# EAGLE board cardinal_v6_3 (EAGLE 5.11)
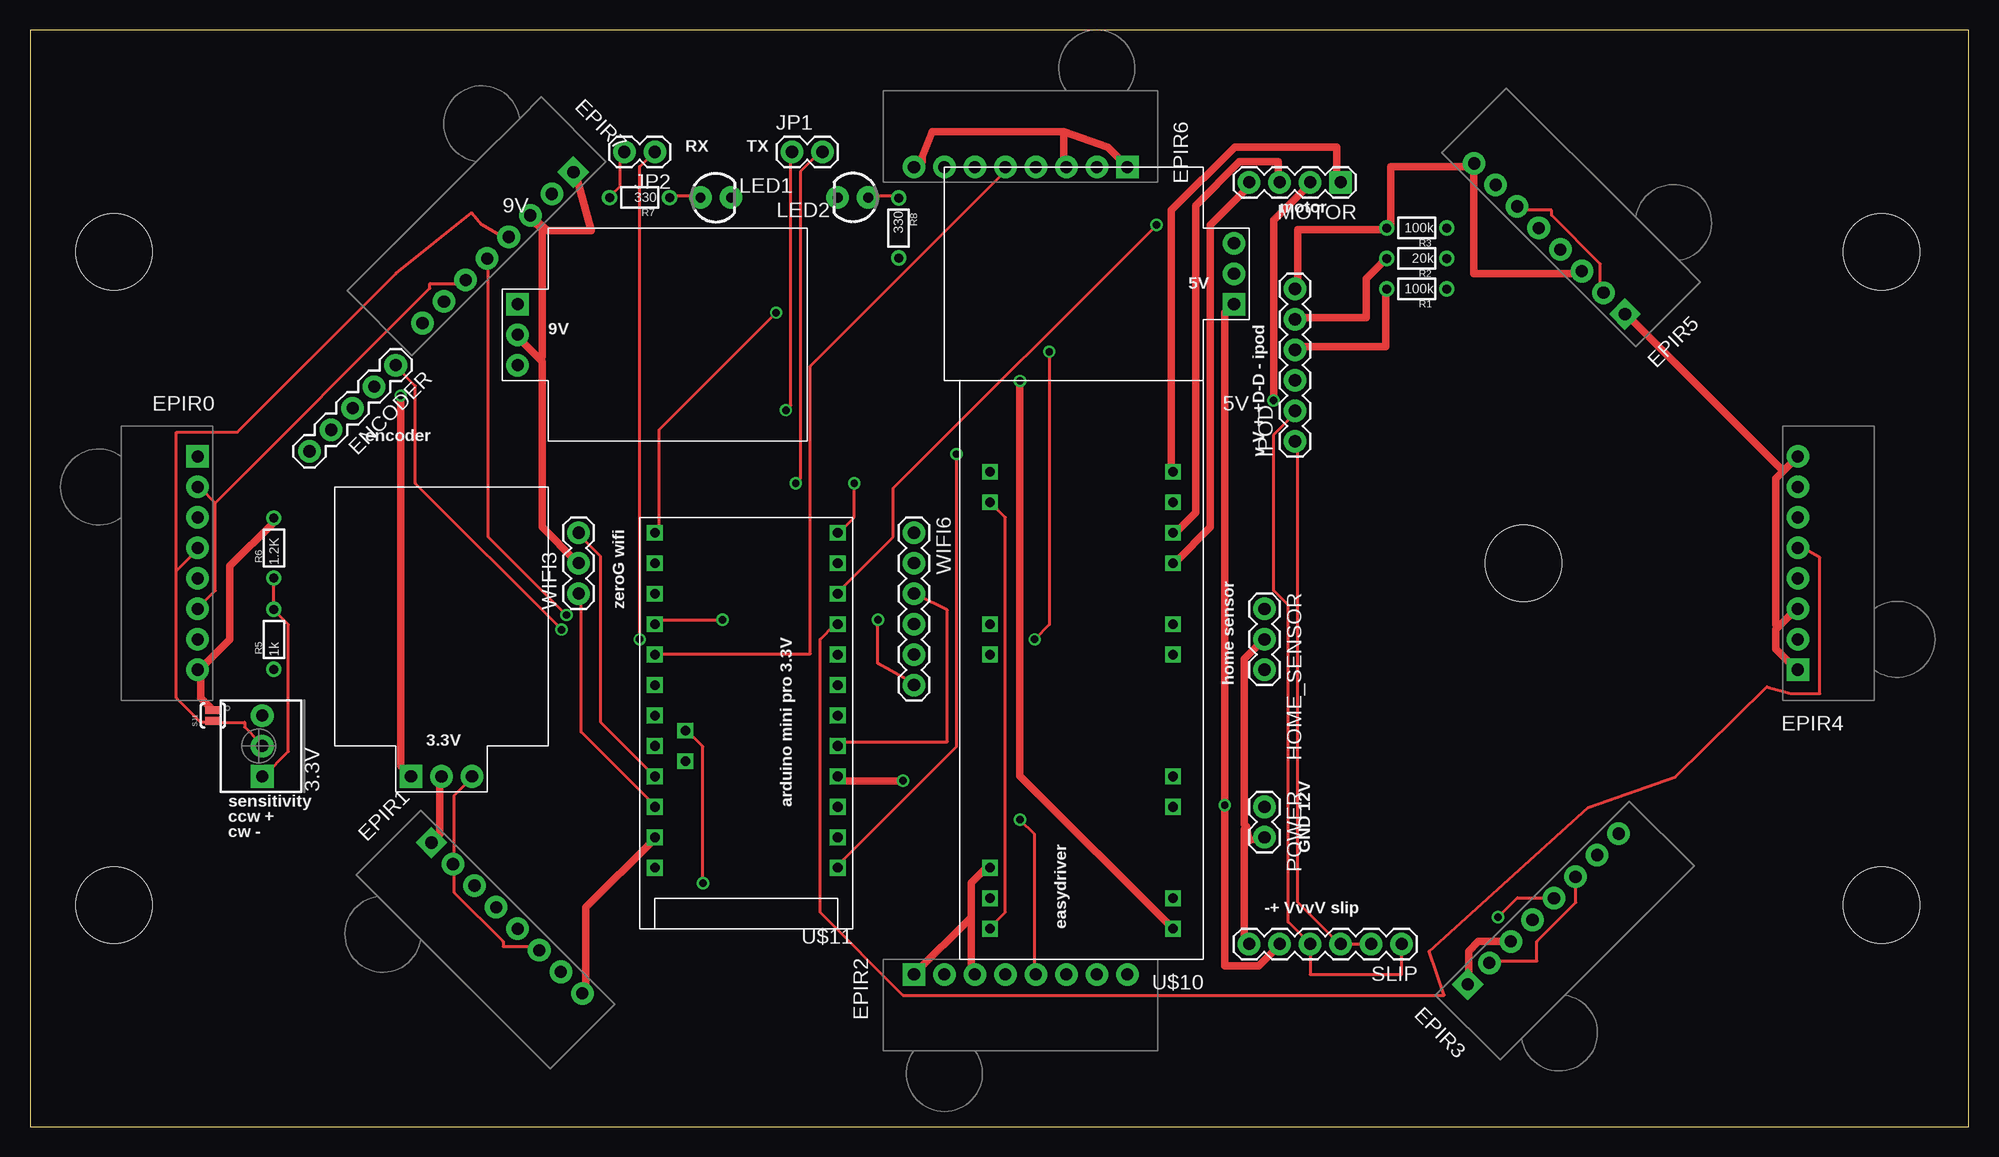
[diagram p0: board, top side]
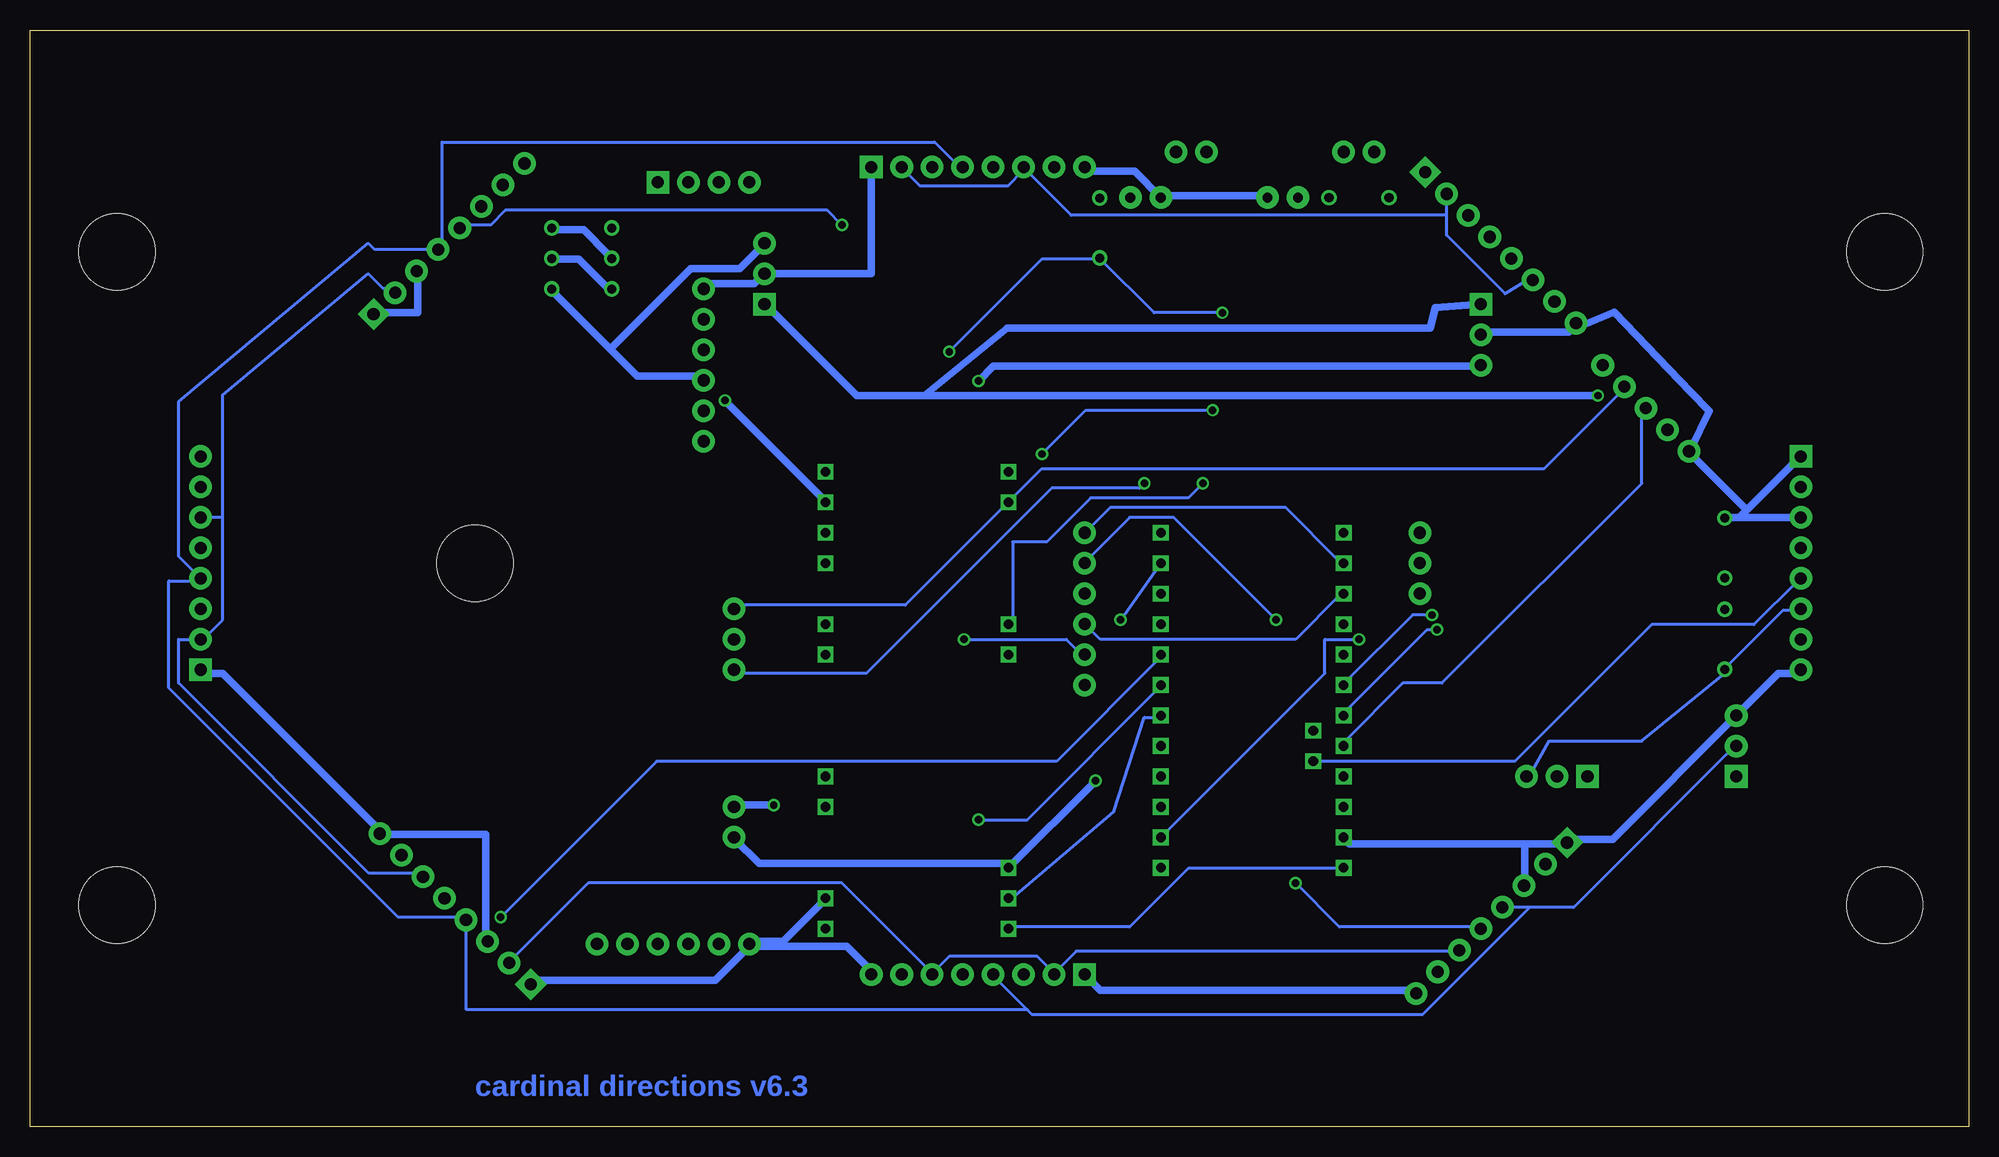
[diagram p1: board, bottom side, seen from below]

Size 161.54 x 91.44 mm. Coordinates in mm from the lower left corner, seen from the top.
Outline: 0,0 161.54,0 161.54,91.44 0,91.44 0,0
Copper layers (1*16): Top 0.035mm / dielectric 1.5mm / Bottom 0.035mm
Design rules "default *": minimum track width 10mil, minimum drill 24mil, track to track 16mil, track to pad 16mil, pad to pad 8mil, via to via 8mil, smd to smd 8mil, copper to edge 40mil, drill to drill 8mil, minimum pad ring 10mil, minimum via ring 8mil, stop-mask expansion 4mil, vias tented up to drill 0mil, thermal gap 10mil
Net classes: 1 normal 24 mil: width 0.61 mm
Holes 6.35 mm at 124.46,46.99 6.99,18.49 6.99,72.95 154.31,18.49 154.31,72.95

## Footprints (pad centres in the part's own frame; a part is rotated, then mirrored left to right if it is on the bottom)
DE-SW_CONVERTER = drill 1.016 pad 1.88 square: 1 0,2.54 | drill 1.016 pad 1.88 round: 2 0,0; 3 0,-2.54
1X05 = drill 1.016 pad 1.88 round: 1 0,0; 2 2.54,0; 3 5.08,0; 4 7.62,0; 5 10.16,0
EPIR = drill 1.016 pad 1.88 square: 1 0,10.16 | drill 1.016 pad 1.88 round: 2 0,7.62; 3 0,5.08; 4 0,2.54; 5 0,0; 6 0,-2.54; 7 0,-5.08; 8 0,-7.62
1X03 = drill 1.016 pad 1.88 round: 1 0,0; 2 2.54,0; 3 5.08,0
1X06 = drill 1.016 pad 1.88 round: 1 0,0; 2 2.54,0; 3 5.08,0; 4 7.62,0; 5 10.16,0; 6 12.7,0
1X02 = drill 1.016 pad 1.88 round: 1 0,0; 2 2.54,0
LED3MM = drill 0.813 pad 1.88 round: A -1.27,0; K 1.27,0
1X04 = drill 1.016 pad 1.88 square: 1 0,0 | drill 1.016 pad 1.88 round: 2 2.54,0; 3 5.08,0; 4 7.62,0
1/6W-RES = drill 0.762 round: 1 -2.5,0; 2 2.5,0
3362U-2 = drill 1.016 pad 1.88 square: 1 -2.54,-0.305 | drill 1.016 pad 1.88 round: 2 0,-0.305; 3 2.54,-0.305
SJ_2S-NO = smd 0.635 x 1.27: 1 -0.45,0; 2 0.45,0
EASYDRIVER_V43 = drill 0.8 square: 1 -7.62,17.78; 2 -7.62,15.24; 3 -7.62,7.62; 4 -7.62,5.08; 5 -7.62,-5.08; 6 -7.62,-7.62; 7 -7.62,-12.7; 8 -7.62,-15.24; 9 -7.62,-17.78; 10 -7.62,-20.32; 11 7.62,17.78; 12 7.62,15.24; 13 7.62,12.7; 14 7.62,-5.08; 15 7.62,-7.62; 16 7.62,-17.78; 17 7.62,-20.32
ARDUINO_MINI_PRO = drill 0.8 square: 2 -7.62,2.54; 3 -7.62,0; 4 -7.62,-2.54; 5 -7.62,-5.08; 6 -7.62,-7.62; 7 -7.62,-10.16; 8 -7.62,-12.7; 9 -7.62,-15.24; 10 7.62,-15.24; 11 7.62,-12.7; 12 7.62,-10.16; 13 7.62,-7.62; A0 7.62,-5.08; A1 7.62,-2.54; A2 7.62,0; A3 7.62,2.54; A4 5.08,1.27; A5 5.08,3.81; GND -7.62,5.08; GND@1 7.62,10.16; RAW 7.62,12.7; RST -7.62,7.62; RST@1 7.62,7.62; RXI -7.62,10.16; TX0 -7.62,12.7; VCC 7.62,5.08

## Placement (x,y rotation side)
3.3V  DE-SW-CONVERTERA  [DE-SW_CONVERTER]  34.29,29.21 90 top
5V  DE-SW-CONVERTERA  [DE-SW_CONVERTER]  100.33,71.12 180 top
9V  DE-SW-CONVERTERA  [DE-SW_CONVERTER]  40.64,66.04 0 top
ENCODER  [1X05]  30.48,63.5 225 top
EPIR0  EPIRA  [EPIR]  13.97,45.72 0 top
EPIR1  EPIRA  [EPIR]  40.64,16.51 45 top
EPIR2  EPIRA  [EPIR]  83.82,12.7 90 top
EPIR3  EPIRA  [EPIR]  127,19.05 135 top
EPIR4  EPIRA  [EPIR]  147.32,48.26 180 top
EPIR5  EPIRA  [EPIR]  125.73,74.93 225 top
EPIR6  EPIRA  [EPIR]  81.28,80.01 270 top
EPIR7  EPIRA  [EPIR]  38.1,72.39 315 top
HOME_SENSOR  [1X03]  102.87,43.18 270 top
IPOD  v-v+ + D-D+ -  [1X06]  105.41,57.15 90 top
JP1  sleep JP  [1X02]  63.5,81.28 0 top
JP2  LED JP  [1X02]  52.07,81.28 180 top
LED1  [LED3MM]  57.15,77.47 0 top
LED2  [LED3MM]  68.58,77.47 180 top
MOTOR  [1X04]  109.22,78.74 180 top
POWER  [1X02]  102.87,26.67 270 top
R1  100k  [1/6W-RES]  115.57,69.85 180 top
R2  20k  [1/6W-RES]  115.57,72.39 180 top
R3  100k  [1/6W-RES]  115.57,74.93 180 top
R4  TRIMPOT 1K  [3362U-2]  19.05,31.75 90 top
R5  1k  [1/6W-RES]  20.32,40.64 90 top
R6  1.2K  [1/6W-RES]  20.32,48.26 90 top
R7  330  [1/6W-RES]  50.8,77.47 180 top
R8  330  [1/6W-RES]  72.39,74.93 270 top
SJ1  SOLDERJUMPERNO  [SJ_2S-NO]  15.24,34.29 90 top
SLIP  [1X06]  114.3,15.24 180 top
U$10  EASYDRIVER_V43A  [EASYDRIVER_V43]  87.63,34.29 180 top
U$11  ARDUINO_MINI_PROA  [ARDUINO_MINI_PRO]  59.69,34.29 180 top
WIFI3  [1X03]  45.72,44.45 90 top
WIFI6  [1X06]  73.66,49.53 270 top

## Library data of the parts
3.3V 5V 9V EPIR0 EPIR1-EPIR7 U$10 U$11 = stephanschulz
ENCODER HOME_SENSOR IPOD JP1 JP2 LED1 LED2 MOTOR POWER R1-R8 SJ1 SLIP WIFI3 WIFI6 = SparkFun

## Nets
3.3V: 3.3V.3 EPIR0.2 EPIR0.6 EPIR1.2 EPIR1.6 EPIR2.2 EPIR2.6 EPIR3.2 EPIR3.6 EPIR4.2 EPIR4.6 EPIR5.2 EPIR5.6 EPIR6.2 EPIR6.6 EPIR7.2 EPIR7.6 R5.1
5V [normal 24 mil]: 5V.3 IPOD.3 R1.1
5V#2: ENCODER.2 HOME_SENSOR.1 U$10.11 U$10.16 U$11.RAW
12V [normal 24 mil]: 3.3V.1 5V.1 9V.1 POWER.1 SLIP.5
GND [normal 24 mil]: 3.3V.2 5V.2 9V.2 ENCODER.5 EPIR0.1 EPIR0.3 EPIR0.8 EPIR1.1 EPIR1.3 EPIR1.8 EPIR2.1 EPIR2.3 EPIR2.8 EPIR3.1 EPIR3.3 EPIR3.8 EPIR4.1 EPIR4.3 EPIR4.8 EPIR5.1 EPIR5.3 EPIR5.8 EPIR6.1 EPIR6.3 EPIR6.8 EPIR7.1 EPIR7.3 EPIR7.8 HOME_SENSOR.2 IPOD.6 LED1.K LED2.K POWER.2 R3.2 R4.3 R6.2 SJ1.2 SLIP.6 U$10.2 U$10.13 U$11.GND U$11.GND@1 WIFI3.2
N$1: R4.1 R5.2 R6.1
N$3: JP1.1 U$11.TX0
N$4: JP2.1 U$11.RXI
N$5: JP2.2 R7.2
N$6: LED1.A R7.1
N$9: IPOD.1 SLIP.2 SLIP.3
N$10: LED2.A R8.1
N$11: IPOD.2 SLIP.1 SLIP.4
N$13 [normal 24 mil]: IPOD.5 R2.2 R3.1
N$14 [normal 24 mil]: IPOD.4 R1.2 R2.1
N$16 [normal 24 mil]: MOTOR.4 U$10.7
N$17 [normal 24 mil]: MOTOR.3 U$10.8
N$18 [normal 24 mil]: MOTOR.2 U$10.9
N$19 [normal 24 mil]: MOTOR.1 U$10.10
N$22: U$11.11 WIFI6.1
N$23: JP1.2 U$10.15
N$24: U$11.13 WIFI6.2
N$25: U$11.2 WIFI6.3
N$26 [normal 24 mil]: 9V.3 U$10.1
N$27: U$11.VCC WIFI3.3
N$29: U$11.12 WIFI6.4
N$30: R8.2 U$11.10 WIFI6.5
N$31: U$11.8 WIFI6.6
N$32: U$11.RST@1 WIFI3.1
N$33: ENCODER.1 U$11.A2
N$34: ENCODER.3 U$11.A3
N$35: EPIR6.5 U$11.A0
N$36: U$10.12 U$11.3
N$37: EPIR0.5 U$11.A5
N$38: EPIR1.5 U$11.A4
N$39: EPIR2.5 U$11.4
N$40: EPIR3.5 U$11.5
N$41: EPIR4.5 U$11.6
N$42: EPIR5.5 U$11.7
N$43: EPIR7.5 U$11.A1
N$44: HOME_SENSOR.3 U$11.9
SNS: EPIR0.4 EPIR1.4 EPIR2.4 EPIR3.4 EPIR4.4 EPIR5.4 EPIR6.4 EPIR7.4 R4.2 SJ1.1

## Tracks (layer width: path | path; a pad name or v marks a point on that pad's centre or on a via)
3.3V
  Top 0.254: EPIR3.2 121.92,13.82 125.58,13.82 125.58,15.44 128.83,18.69 128.83,20.73 EPIR3.6 | EPIR5.6 123.95,76.4 126.8,76.4 126.8,76 130.86,71.93 130.86,69.9 EPIR5.2 | 15.44,52.02 14.22,53.24 EPIR0.2 | 15.44,52.02 15.44,44.7 14.22,43.48 EPIR0.6 | EPIR1.6 42.27,15.04 39.42,15.04 39.42,15.44 35.36,19.51 35.36,21.54 EPIR1.2 35.36,21.95 35.36,27.64 36.58,28.85 3.3V.3 | 15.44,52.02 33.33,69.9 33.33,70.31 36.17,70.31 EPIR7.6
  Bottom 0.254: 145.49,50.8 145.49,42.27 147.12,40.64 EPIR4.2 149.15,40.64 149.15,36.98 133.3,21.13 128.83,21.13 EPIR3.6 | 145.49,50.8 EPIR4.6 | 145.49,50.8 145.49,61.01 133.35,71.12 132.13,69.9 131.27,69.9 EPIR5.2 | EPIR6.2 88.59,79.65 87.38,78.44 80.06,78.44 78.84,79.65 EPIR6.6 78.44,79.65 74.78,76 43.48,76 | 43.48,76 43.48,74.32 38.61,69.44 36.58,70.71 EPIR7.6 | 43.48,76 43.48,77.62 EPIR7.2 | EPIR0.6 14.22,43.08 15.44,43.08 20.32,38.2 R5.1 20.32,37.8 27.23,32.16 34.95,32.16 36.58,29.26 3.3V.3 | EPIR1.6 42.67,14.63 74.37,14.63 76,13.01 EPIR2.2 76.4,13.01 77.62,14.22 84.94,14.22 86.16,13.01 EPIR2.6 86.56,13.01 93.88,20.32 115.01,20.32 121.51,13.82 EPIR3.2
5V
  Bottom 0.61: 113.18,64.82 110.95,62.59 105.66,62.59 IPOD.3 | 113.18,64.82 117.86,69.49 R1.1 | 5V.3 100.38,73.56 102.41,71.53 106.48,71.53 113.18,64.82
5V#2
  Top 0.254: U$10.11 80.06,16.66 81.28,17.88 81.28,50.8 U$10.16
  Bottom 0.254: U$11.RAW 52.43,21.54 65.02,21.54 69.9,16.66 79.65,16.66 U$10.11 | HOME_SENSOR.1 102.82,43.48 88.59,43.48 U$10.16 77.22,54.86 35.36,54.86 28.85,61.37 ENCODER.2
12V  (via drill 0.61)
  Top 0.61: v30.89,60.96 30.89,30.07 3.3V.1 | SLIP.5 104.04,15.04 102.41,13.41 99.57,13.41 v99.57,26.82 99.57,67.87 99.97,68.28 5V.1
  Bottom 0.61: 87.02,60.96 92.66,60.96 99.97,68.28 5V.1 | v30.89,60.96 87.02,60.96 | 87.02,60.96 80.11,66.6 44.86,66.6 44.45,68.28 9V.1 | v99.57,26.82 102.82,26.82 POWER.1
GND  (via drill 0.61)
  Top 0.61: 101.4,24.99 101.19,24.79 101.19,15.85 101.6,15.44 SLIP.6 | 101.4,24.99 101.55,23.88 POWER.2 | HOME_SENSOR.2 102.82,40.64 101.19,39.01 101.19,25.2 101.4,24.99 | EPIR3.1 119.89,12.19 119.89,14.63 120.7,15.44 123.14,15.44 EPIR3.3 | 145.69,41.66 145.49,41.45 145.49,39.83 147.12,38.2 EPIR4.1 | 145.69,41.66 147.12,43.08 EPIR4.3 | 146.1,54.66 145.49,54.05 145.49,41.86 145.69,41.66 | 146.1,54.66 EPIR4.8 | 86.16,82.96 75.18,82.96 74.37,80.87 74.37,80.47 73.97,80.06 EPIR6.8 | 86.16,82.96 86.16,80.06 EPIR6.3 | 86.16,82.96 89.81,81.69 91.44,80.06 EPIR6.1 | IPOD.6 105.66,69.9 105.66,74.78 112.98,74.78 R3.2 113.39,75.18 113.39,80.06 120.29,80.06 | 120.29,80.06 120.29,71.12 129.24,71.12 EPIR5.3 | 120.29,80.06 EPIR5.8 | EPIR7.1 45.52,79.25 46.79,74.73 43.13,74.73 EPIR7.3 41.86,75.59 42.67,74.78 42.67,64.21 42.47,64.01 | 42.47,64.01 40.64,65.84 9V.2 | 42.47,64.01 42.67,63.8 42.67,49.99 45.52,47.14 WIFI3.2 | SJ1.2 15.04,34.95 14.22,35.76 14.22,37.8 EPIR0.8 14.22,38.2 16.66,40.64 16.66,46.74 20.32,50.39 R6.2 | EPIR1.1 33.73,23.98 34.14,24.38 34.14,28.85 3.3V.2 | 78.44,17.48 78.44,13.01 EPIR2.3 | 78.44,17.48 78.44,20.32 79.65,21.54 U$10.13 | EPIR2.1 78.44,17.48 | 146.1,54.66 133.3,67.46 EPIR5.1 | v72.75,28.85 67.46,28.85 U$11.GND | U$11.GND@1 52.02,23.98 46.33,18.29 46.33,11.38 EPIR1.8
  Bottom 0.61: U$10.2 95.5,18.69 98.75,15.44 101.6,15.44 SLIP.6 101.6,15.04 | 101.6,15.04 93.47,15.04 91.44,13.01 EPIR2.8 | EPIR4.1 147.12,37.8 145.49,37.8 132.49,24.79 EPIR3.8 132.08,24.38 123.55,24.38 123.55,15.85 EPIR3.3 | 101.6,15.04 104.44,12.19 119.48,12.19 EPIR3.1 | EPIR5.3 129.24,71.12 129.24,67.87 132.89,67.87 EPIR5.1 | IPOD.6 105.26,69.9 104.85,70.31 101.19,70.31 100.38,71.12 5V.2 91.44,71.12 EPIR6.1 | 19.1,50.8 20.32,50.8 R6.2 | 19.1,50.8 EPIR0.3 | 19.1,50.8 18.49,51.41 | 18.49,51.41 14.22,55.68 EPIR0.1 | 18.49,51.41 23.16,56.08 ENCODER.5 23.16,56.49 21.59,59.69 23.16,61.27 29.52,67.92 32.51,66.65 EPIR7.8 32.92,66.65 33.33,66.24 40.64,66.24 9V.2 | EPIR0.8 14.22,37.8 15.85,37.8 R4.3 29.67,23.98 33.33,23.98 EPIR1.1 33.73,23.57 36.98,23.57 | 36.98,23.57 36.98,20.32 EPIR1.3 | EPIR2.1 72.34,11.38 46.33,11.38 EPIR1.8 | LED1.K 58.52,77.62 67.06,77.62 LED2.K 69.49,79.65 73.56,79.65 EPIR6.8 | 36.98,23.57 51.61,23.57 52.02,23.98 U$11.GND@1 | v72.75,28.85 U$10.13 80.06,21.95 100.79,21.95 102.82,23.98 POWER.2
N$1
  Top 0.254: R6.1 R5.2 20.32,43.08 21.54,41.86 21.54,31.29 19.51,29.26 R4.1
N$3  (via drill 0.61)
  Top 0.254: v77.22,56.08 77.22,31.7 67.46,21.95 U$11.TX0 | v62.99,59.74 63.4,60.15 63.4,81.28 JP1.1
  Bottom 0.254: v77.22,56.08 73.56,59.74 v62.99,59.74
N$4  (via drill 0.61)
  Top 0.254: v50.8,40.64 50.8,80.06 52.02,81.28 JP2.1
  Bottom 0.254: v50.8,40.64 53.65,40.64 53.65,37.8 U$11.RXI
N$5
  Top 0.254: R7.2 48.36,77.62 49.17,78.44 49.17,81.28 JP2.2
N$6
  Top 0.254: R7.1 53.65,77.62 55.68,77.62 LED1.A
N$9
  Top 0.254: SLIP.2 SLIP.3 108.92,15.44 105.66,18.69 105.66,56.9 IPOD.1
N$10
  Top 0.254: R8.1 72.34,77.62 69.9,77.62 LED2.A
N$11
  Top 0.254: SLIP.1 114.3,12.7 106.68,12.7 SLIP.4 104.85,17.07 104.85,43.48 103.63,44.7 103.63,57.71 105.26,59.33 IPOD.2
N$13
  Top 0.61: IPOD.5 105.66,67.46 111.35,67.46 111.35,70.71 112.98,72.34 R2.2
  Bottom 0.61: R2.2 113.39,72.75 115.42,74.78 117.86,74.78 R3.1
N$14
  Top 0.61: IPOD.4 105.66,65.02 112.98,65.02 112.98,69.49 R1.2
  Bottom 0.61: R1.2 113.39,69.9 115.82,72.34 117.86,72.34 R2.1
N$16
  Top 0.61: U$10.7 95.5,47.14 98.35,49.99 98.35,75.18 101.6,78.44 MOTOR.4
N$17
  Top 0.61: U$10.8 95.5,49.58 97.13,51.21 97.13,76.81 100.79,80.47 104.04,80.47 104.04,78.84 MOTOR.3
N$18  (via drill 0.61)
  Top 0.61: v103.63,60.55 103.63,75.59 106.48,78.44 MOTOR.2
  Bottom 0.61: v103.63,60.55 95.5,52.43 U$10.9
N$19
  Top 0.61: U$10.10 95.1,54.86 95.1,76.4 100.38,81.69 108.92,81.69 108.92,78.84 MOTOR.1
N$22
  Bottom 0.254: U$11.11 52.43,47.14 56.9,51.61 71.53,51.61 73.56,49.58 WIFI6.1
N$23  (via drill 0.61)
  Top 0.254: v63.8,53.65 64.21,54.05 64.21,79.65 65.84,81.28 JP1.2
  Bottom 0.254: v63.8,53.65 65.02,52.43 73.15,52.43 76.81,48.77 79.65,48.77 79.65,42.27 U$10.15
N$24  (via drill 0.61)
  Top 0.254: v57.71,42.27 52.43,42.27 U$11.13
  Bottom 0.254: v57.71,42.27 66.24,50.8 69.9,50.8 73.56,47.14 WIFI6.2
N$25
  Top 0.254: U$11.2 67.46,32.11 76.45,32.11 76.45,43.08 73.97,44.3 WIFI6.3
N$26  (via drill 0.61)
  Top 0.61: v82.5,62.18 82.5,29.26 U$10.1
  Bottom 0.61: v82.5,62.18 81.28,63.4 40.64,63.4 9V.3
N$27
  Top 0.254: U$11.VCC 47.55,33.73 47.55,47.55 45.92,49.17 WIFI3.3
N$29
  Bottom 0.254: U$11.12 52.43,44.3 56.08,40.64 72.34,40.64 73.56,41.86 WIFI6.4
N$30  (via drill 0.61)
  Top 0.254: v62.18,67.87 52.43,58.12 52.43,49.58 U$11.10 | v83.72,40.64 84.94,41.86 v84.94,64.62
  Bottom 0.254: v62.18,67.87 67.87,67.87 72.34,72.34 R8.2 72.75,72.34 77.22,72.34 v84.94,64.62 | v83.72,40.64 75.18,40.64 73.97,39.42 WIFI6.5
N$31  (via drill 0.61)
  Top 0.254: v70.66,42.27 70.66,38.61 73.56,36.98 WIFI6.6
  Bottom 0.254: v70.66,42.27 67.46,46.74 U$11.8
N$32
  Top 0.254: U$11.RST@1 52.02,26.82 45.92,32.92 45.92,44.3 WIFI3.1
N$33  (via drill 0.61)
  Top 0.254: v44.3,41.45 32.11,53.65 32.11,61.77 30.48,63.4 ENCODER.1
  Bottom 0.254: v44.3,41.45 45.11,41.45 52.02,34.54 U$11.A2
N$34
  Bottom 0.254: U$11.A3 52.02,32.11 47.14,36.98 43.89,36.98 27.23,53.65 27.23,59.74 ENCODER.3
N$35
  Top 0.254: U$11.A0 52.43,39.42 65.02,39.42 65.02,63.4 81.28,79.65 EPIR6.5
N$36
  Bottom 0.254: U$10.12 79.65,19.1 71.22,26.26 68.68,34.14 67.46,34.14 U$11.3
N$37
  Bottom 0.254: U$11.A5 37.8,30.48 26.42,41.86 17.88,41.86 14.22,45.52 EPIR0.5
N$38  (via drill 0.61)
  Top 0.254: v56.08,20.32 56.08,31.7 54.86,32.92 U$11.A4
  Bottom 0.254: v56.08,20.32 52.43,16.66 40.64,16.66 EPIR1.5
N$39  (via drill 0.61)
  Top 0.254: v82.5,25.6 83.72,24.38 83.72,13.01 EPIR2.5
  Bottom 0.254: v82.5,25.6 78.44,25.6 67.46,36.58 U$11.4
N$40  (via drill 0.61)
  Top 0.254: v122.33,17.48 123.95,19.1 126.8,19.1 EPIR3.5
  Bottom 0.254: v122.33,17.48 109.32,30.48 76,30.48 67.46,39.01 U$11.5
N$41
  Top 0.254: U$11.6 67.06,41.86 65.84,40.64 65.84,17.88 72.75,10.97 117.86,10.97 116.59,14.63 129.84,26.62 137.11,29.16 144.73,36.68 146.71,36.12 149.15,36.12 149.15,47.45 147.52,48.36 EPIR4.5
N$42  (via drill 0.61)
  Top 0.254: v93.88,75.18 71.93,53.24 71.93,49.17 67.46,44.7 U$11.7
  Bottom 0.254: v93.88,75.18 95.1,76.4 121.92,76.4 123.14,75.18 125.58,75.18 EPIR5.5
N$43  (via drill 0.61)
  Top 0.254: v44.7,42.67 38.2,49.17 38.2,72.34 EPIR7.5
  Bottom 0.254: v44.7,42.67 46.33,42.67 52.02,36.98 U$11.A1
N$44  (via drill 0.61)
  Top 0.254: v68.68,53.65 68.68,50.8 67.46,49.58 U$11.9
  Bottom 0.254: v68.68,53.65 69.09,53.24 76.4,53.24 91.85,37.8 102.82,37.8 HOME_SENSOR.3
SNS
  Top 0.254: R4.2 19.1,32.11 17.88,33.33 17.88,33.73 15.44,33.73 SJ1.1 15.04,33.73 14.22,33.73 12.19,35.76 12.19,46.33 | 12.19,46.33 13.82,47.95 EPIR0.4 | 12.19,46.33 12.19,57.91 17.27,57.91 30.48,71.12 36.83,76.2 37.59,75.23 39.83,73.97 EPIR7.4
  Bottom 0.254: 36.58,18.29 32.92,18.29 19.51,31.7 R4.2 | 36.58,18.29 38.61,18.29 EPIR1.4 | 78.44,9.75 78.03,9.35 45.52,9.35 36.58,18.29 | 78.44,9.75 81.28,12.6 EPIR2.4 | 78.44,9.75 125.17,9.75 125.17,17.07 EPIR3.4 125.58,17.48 130.86,17.48 149.96,36.58 149.96,45.52 147.52,45.52 EPIR4.4 149.15,47.55 149.15,60.45 133.35,73.66 132.84,73.15 127.61,73.15 EPIR5.4 127.2,73.15 127.2,82.09 86.16,82.09 84.12,80.06 EPIR6.4

## Text on the board
Bottom: cardinal directions v6.3
tPlace: RX | TX | motor | 5V | 9V | encoder | v V + +D-D - ipod | zeroG wifi | home sensor | 3.3V | sensitivity | arduino mini pro 3.3V | ccw + | cw - | GND 12V | -+ VvvV slip | easydriver